# Altium PCB TestProj_DDR3.PcbDoc (part 2 of 2)
Units mil, origin at the board's own origin, x right, y up, seen from the top; angles counter-clockwise.
Board outline 6000 x 4000 mil, 4 copper layers (Component Side, Power Plane, Ground Plane, Solder Side), stack 51.034 mil thick; 26 components, 54 nets, 768 pads, 131 vias.
Unrouted connection lines stored in the file: 84.
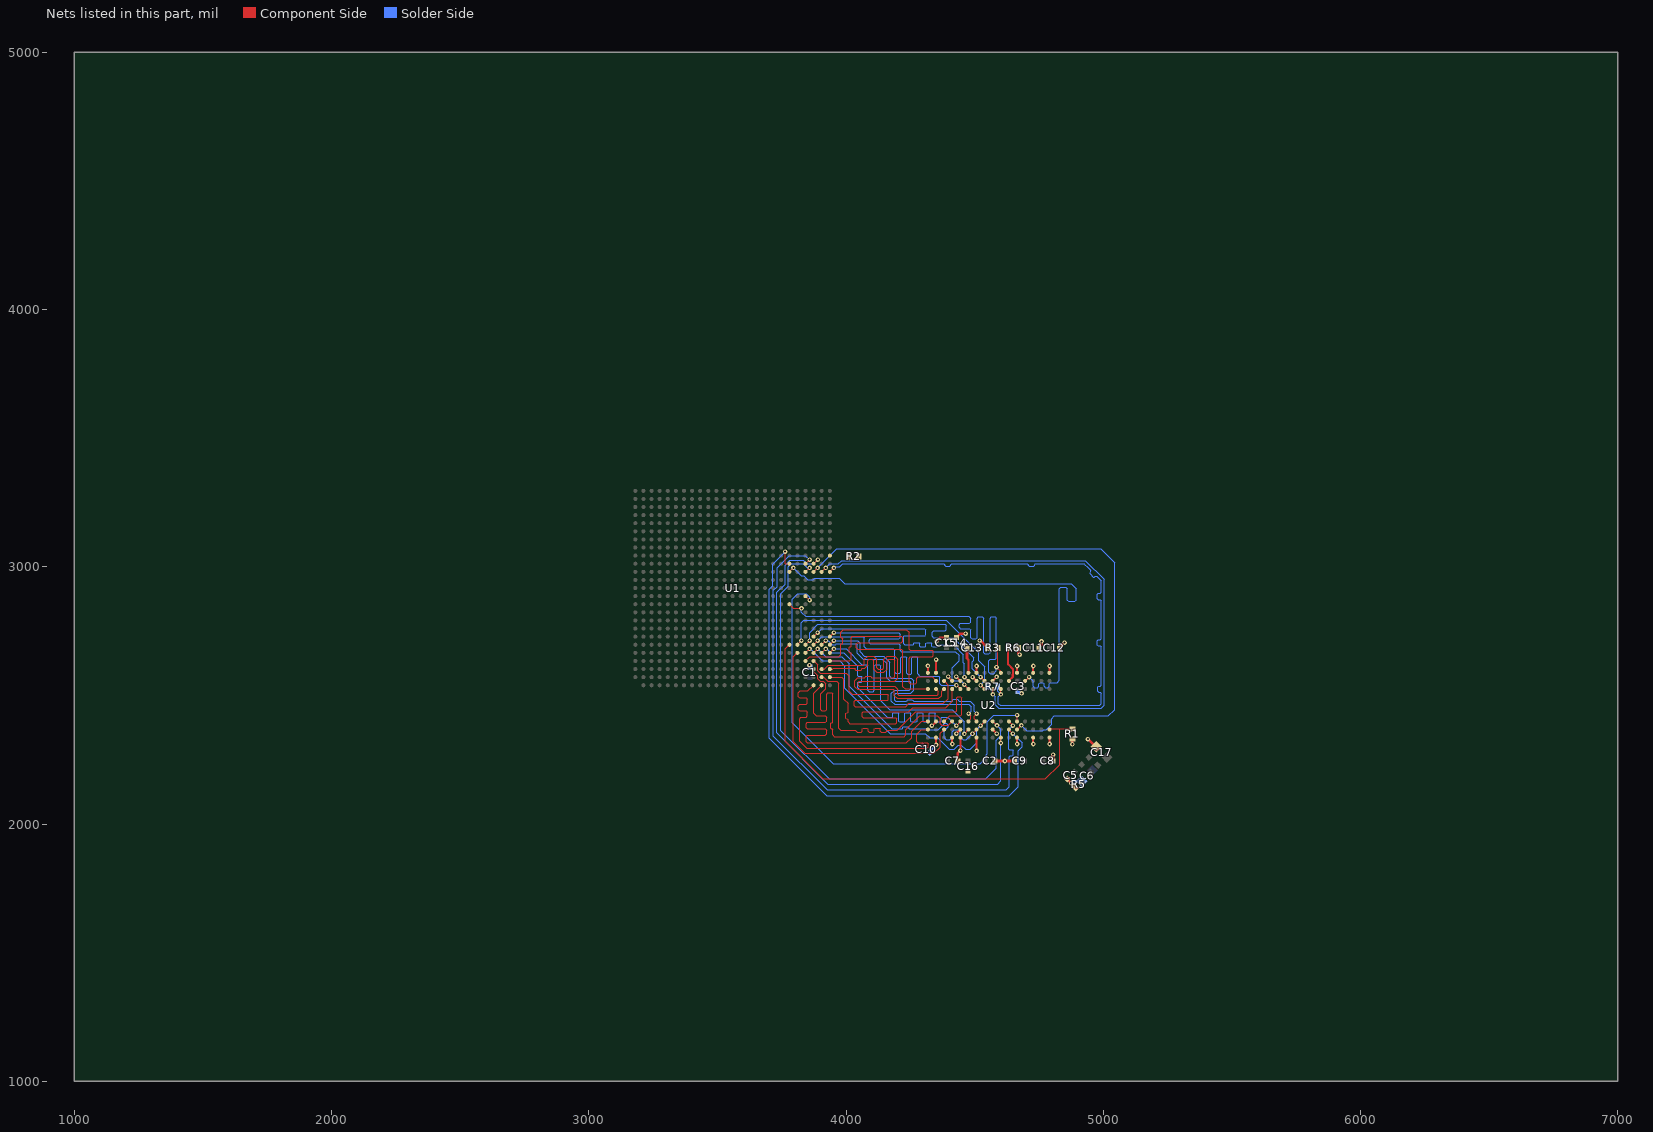
[diagram p4: the nets of this part, all layers, seen from the top]

## Via types
v1: diameter 17.72, hole 7.87, Component Side to Solder Side, 131 vias

## Nets (pads, with @x,y where several pads share a name; then routed paths per layer and width w, separated by ;. In a path a pad name is that pad's centre, name@x,y a point inside that pad or via, vN(x,y) a via of type N, cw(c..) or ccw(c..) an arc to the next point about the centre after c; other vN are vias at no path point) (continued)
DRAM_CLK0_N: R7.1 U1.AE15 U2.K7 | length 2171.6
  Component Side w4.2: v1@4601.82,2504.48 U2.K7@4601.82,2524.83
  Component Side w4.3: U1.AE15@3937.01,2980.31 v1@3948.82,2992.12
  Solder Side w4.2: 4592.71,2494.29 v1(4602.36,2503.94)
  Solder Side w4.3: v1@3956.69,2992.13 3953.82,2995 v1(3952.75,2996.06) 3956.62,2999.92 3975.92,2999.92 3988,3012 4370,3012 4379.9,3012 4383.55,3008.36 4383.55,3005.64 4387.19,3002 4404.2,3002 4407.85,3005.64 4407.85,3008.36 4411.49,3012 4420,3012 4675,3012 4684.25,3012 4704.9,3012 4708.55,3008.36 4708.55,3005.64 4712.19,3002 4729.2,3002 4732.85,3005.64 4732.85,3008.36 4736.49,3012 4745,3012 4925.61,3012 4928.8,3008.8 4937.39,3000.21 4952,2985.61 4952,2980.45 4948.73,2977.18 4948.73,2972.03 4960.76,2960 4965.91,2960 4969.18,2963.27 4974.34,2963.27 4990,2947.61 4991.7,2945.91 4991.7,2920 4991.7,2900.09 4988.06,2896.45 4980.34,2896.45 4976.7,2892.8 4976.7,2875.8 4980.34,2872.15 4988.06,2872.15 4991.7,2868.51 4991.7,2860 4991.7,2765 4991.7,2740.75 4991.7,2720.09 4988.06,2716.45 4980.34,2716.45 4976.7,2712.8 4976.7,2695.8 4980.34,2692.15 4988.06,2692.15 4991.7,2688.51 4991.7,2680 4991.7,2560 4991.7,2540.09 4988.06,2536.45 4982.34,2536.45 4978.7,2532.8 4978.7,2515.8 4982.34,2512.15 4988.06,2512.15 4991.7,2508.51 4991.7,2500 4991.7,2466.7 4987.3,2462.3 4598.7,2462.3 4592.71,2468.29 4592.71,2494.29 ; R7.1@4589.69,2534 4589.69,2516.61 v1(4602.36,2503.94)
DRAM_CLK0_P: R7.2 U1.AD15 U2.J7 | length 2176.2
  Component Side w4.2: v1@4570.32,2504.48 U2.J7@4570.32,2524.83
  Component Side w4.3: U1.AD15@3905.51,2980.31 v1(3921.25,2996.06)
  Solder Side w4.3: v1@3920.08,2995.75 v1@3920.38,2996.06 ; v1(3921.25,2996.06) v1@3920.38,2996.06 ; R7.2@4550.32,2534 4570.87,2513.45 v1(4570.87,2503.94) 4580.46,2494.34 4580.46,2490.79 4580.41,2490.74 4580.41,2463.19 4593.61,2450 4992.39,2450 5004,2461.61 5004,2951 4930.7,3024.3 3982.91,3024.3 3970.83,3012.22 3936.55,3012.22 v1@3920.38,2996.06
DRAM_CS0_B: U1.Y16 U2.L2 | length 2138.7
  Component Side w4.5: v1(3763,3059) 3763.78,3058.22 3763.78,3011.81 U1.Y16@3779.53,3011.81 ; U2.L2@4633.31,2366.69 v1(4649.06,2350.94)
  Solder Side w4.5: v1(3763,3059) 3763,3058.27 3715.44,3010.71 3715.44,2926.61 3702,2913.17 3702,2333 3925,2110 4635,2110 4670,2145 4670,2285 4685,2300 4685,2315 v1(4649.06,2350.94)
DRAM_D0: U1.AD2 U2.C3 | length 1017
  Component Side w4.5: U1.AD2@3905.51,2570.87 3914.13,2570.87 3929.88,2555.12 3964.57,2555.12 3972.44,2547.24 3972.44,2372.56 3980,2365 4019.68,2365 4036.52,2365 4040.04,2361.47 4040.04,2360.52 4043.57,2357 4060.02,2357 4063.54,2360.52 4063.54,2365 4063.54,2369.48 4067.07,2373 4083.52,2373 4087.04,2369.48 4087.04,2365 4087.04,2360.52 4090.57,2357 4107.02,2357 4110.54,2360.52 4110.54,2365 4110.54,2369.48 4114.07,2373 4130.52,2373 4134.04,2369.48 4134.04,2365 4134.04,2360.52 4137.57,2357 4154.02,2357 4157.54,2360.52 4157.54,2361.47 4161.07,2365 4169.29,2365 4199.65,2365 4271.65,2437.01 4427.01,2437.01 4430,2440 4430,2490 4435,2495 4445,2495 4450,2490 4450,2425 4445,2420 4402.5,2420 U2.C3@4381.35,2398.84
DRAM_D1: U1.AE2 U2.D7 | length 1018.9
  Component Side w4.5: U1.AE2@3937.01,2570.87 3984.25,2570.87 3992.13,2562.99 3992.13,2484.25 4007.87,2468.5 4007.87,2444.88 4007.87,2434.73 4005.52,2432.38 4002.22,2432.38 3999.87,2430.03 3999.87,2411.23 4002.22,2408.88 4005.52,2408.88 4007.87,2406.53 4007.87,2397.13 4015.24,2389.76 4192.91,2389.76 4196.85,2393.7 4196.85,2409.45 4192.91,2413.39 4066.93,2413.39 4062.99,2417.32 4062.99,2433.07 4066.93,2437.01 4243.55,2437.01 4259.3,2452.76 4387.76,2452.76 4412.84,2477.84 U2.D7@4412.84,2524.83
DRAM_D2: U1.AC4 U2.C8 | length 1018.3
  Component Side w4.5: U1.AC4@3874.02,2633.86 3889.47,2618.4 3889.47,2596.55 3899.41,2586.61 4000,2586.61 4011.81,2574.8 4011.81,2515.75 4023.62,2503.94 4161.42,2503.94 4165,2500.35 4165,2483.9 4161.42,2480.32 4035.43,2480.32 4031.5,2476.38 4031.5,2460.63 4035.43,2456.69 4232.28,2456.69 4244.09,2468.5 4378.5,2468.5 4397.39,2487.39 4397.39,2540.28 U2.C8@4381.35,2556.32
DRAM_D3: U1.AA5 U2.C2 | length 1026.5
  Component Side w4.5: U1.AA5@3811.03,2665.35 3795.28,2649.61 3795.28,2318.9 3839.17,2275 4341.93,2275 4365.89,2298.96 4365.89,2351.89 U2.C2@4381.35,2367.35
DRAM_D4: U1.AC1 U2.A2 | length 1022.9
  Component Side w4.5: U1.AC1@3874.02,2539.37 3852.01,2517.36 3822.36,2517.36 3815,2510 3815,2495 3820,2490 3845,2490 3850,2485 3850,2470 3845,2465 3820,2465 3815,2460 3815,2445 3820,2440 3845,2440 3850,2435 3850,2420 3845,2415 3825,2415 3820,2410 3820,2321.73 3846.73,2295 4314.69,2295 4318.9,2299.21 4318.9,2311.02 4314.96,2314.96 4279.53,2314.96 4275,2319.49 4275,2349.8 4292.54,2367.35 U2.A2@4318.35,2367.35
DRAM_D5: U1.AD1 U2.A3 | length 1020.4
  Component Side w4.5: U1.AD1@3905.51,2539.37 3875,2508.86 3875,2430 3885,2420 3920,2420 3925,2415 3925,2400 3920,2395 3850,2395 3845,2390 3845,2375 3850,2370 3920,2370 3925,2365 3925,2350 3920,2345 3850,2345 3845,2340 3845,2320 3850,2315 4235,2315 4255,2335 4255,2360 4293.84,2398.84 U2.A3@4318.35,2398.84
DRAM_D6: U1.AB4 U2.B8 | length 1024.9
  Component Side w4.5: U1.AB4@3842.52,2633.86 3858.56,2649.9 3971.28,2649.9 3980,2658.62 3980,2692.91 3980,2698.62 3982.35,2700.97 3985.38,2700.97 3987.73,2703.32 3987.73,2722.12 3985.38,2724.47 3982.35,2724.47 3980,2726.82 3980,2736.22 3980,2745 3990,2755 4235,2755 4245,2745 4245,2680 4250,2675 4335,2675 4340,2670 4340,2655 4335,2650 4250,2650 4245,2645 4245,2550 4250,2545 4270,2545 4275,2550 4275,2566.78 4280,2571.78 4334.4,2571.78 U2.B8@4349.85,2556.32
DRAM_D7: U1.AE4 U2.A7 | length 1024.9
  Component Side w4.5: U1.AE4@3937.01,2633.86 4013.86,2633.86 4020,2640 4020,2653.54 4020,2662.94 4017.65,2665.29 4014.92,2665.29 4012.57,2667.64 4012.57,2686.44 4014.92,2688.79 4017.65,2688.79 4020,2691.14 4020,2692.91 4020,2725 4025,2730 4215,2730 4220,2725 4220,2710 4215,2705 4045,2705 4040,2700 4040,2685 4045,2680 4215,2680 4220.47,2674.53 4220.47,2534.53 4230.17,2524.83 U2.A7@4318.35,2524.83
DRAM_D8: U1.AD5 U2.E3 | length 1000.4
  Component Side w4.5: U1.AD5@3905.51,2665.35 v1(3921.26,2681.1) ; v1@4429.57,2382.33 U2.E3@4444.34,2397.09
  Solder Side w4.5: v1(3921.26,2681.1) 3925.39,2681.1 3941.14,2665.35 3992.13,2665.35 4045,2612.48 4045,2586.61 4045,2577.21 4047.35,2574.86 4059.65,2574.86 4062,2572.51 4062,2553.71 4059.65,2551.36 4045.18,2551.36 4045,2551.18 4045,2530 4160,2415 4181.1,2415 4182.14,2416.04 4182.14,2429.65 4184.49,2432 4203.29,2432 4205.64,2429.65 4205.64,2415 4205.64,2400.35 4207.99,2398 4226.79,2398 4229.14,2400.35 4229.14,2415 4229.14,2429.65 4231.49,2432 4250.29,2432 4252.64,2429.65 4252.64,2415 4252.64,2400.35 4254.99,2398 4273.79,2398 4276.14,2400.35 4276.14,2415 4276.14,2429.65 4278.49,2432 4297.29,2432 4299.64,2429.65 4299.64,2415 4299.64,2400.35 4301.99,2398 4320.79,2398 4323.14,2400.35 4323.14,2415 4323.14,2429.65 4325.49,2432 4344.29,2432 4346.64,2429.65 4346.64,2415 4346.64,2400.35 4348.99,2398 4367.79,2398 4370.14,2400.35 4370.14,2412.65 4372.49,2415 4381.89,2415 4396.02,2415 v1(4428.7,2382.33)
DRAM_D9: U1.AE5 U2.F2 | length 992.6
  Component Side w4.5: U1.AE5@3937.01,2665.35 v1(3952.76,2681.1) ; v1@4460.96,2350.73 U2.F2@4475.83,2365.6
  Solder Side w4.5: v1(3952.76,2681.1) 4000,2681.1 4061.1,2620 4080,2620 4085,2615 4085,2520 4090,2515 4105,2515 4110,2520 4110,2615 4115,2620 4130,2620 4135,2615 4135,2480 4170,2445 4413.27,2445 4460.09,2398.18 v1(4460.09,2350.73)
DRAM_D10: U1.AA6 U2.H7 | length 1000.4
  Component Side w4.5: U1.AA6@3811.03,2696.85 v1(3826.77,2712.6) ; v1(4523.62,2539.37) 4538.17,2524.83 U2.H7@4538.83,2524.83
  Solder Side w4.5: v1(3826.77,2712.6) 3826.77,2781.77 3836.34,2791.34 4390.46,2791.34 4516,2665.8 4516,2635 4538.83,2612.17 4539.06,2612.17 4539.06,2557.22 4523.62,2541.78 v1(4523.62,2539.37)
DRAM_D11: U1.AE7 U2.F7 | length 995.4
  Component Side w4.5: U1.AE7@3937.01,2728.35 v1(3952.76,2744.09) ; v1@4460.09,2540.57 U2.F7@4475.83,2524.83
  Solder Side w4.5: v1(3952.76,2744.09) 4204.47,2744.09 4210,2738.57 4210,2725 4205,2720 4095,2720 4090,2715 4090,2705 4094.21,2700.79 4204.21,2700.79 4210,2695 4210,2675 4215,2670 4425.63,2670 4440,2655.63 4440,2635 4413.15,2608.15 4413.15,2563.5 4420,2556.65 4448.57,2556.65 4460.09,2545.13 v1(4460.09,2541.45)
DRAM_D12: U1.AB5 U2.H3 | length 1002
  Component Side w4.5: U1.AB5@3842.52,2665.35 v1(3858.27,2681.1) ; v1@4524.06,2382.33 U2.H3@4538.83,2397.09
  Solder Side w4.5: v1(3858.27,2681.1) 3860.06,2681.1 3907.3,2633.86 3976.38,2633.86 3996.06,2614.17 3996.06,2527.56 4172.33,2351.29 4308.71,2351.29 4324.61,2335.39 4357.52,2335.39 4401.57,2291.34 4421.26,2291.34 4437.01,2307.09 4448.82,2307.09 4464.57,2291.34 4483.67,2291.34 4507.33,2315 4507.33,2367.35 4522.75,2382.76 v1(4523.18,2382.33)
DRAM_D13: U1.AC5 U2.G2 | length 993.9
  Component Side w4.5: U1.AC5@3874.02,2665.35 v1(3889.76,2681.1) ; v1@4491.69,2351.7 U2.G2@4507.33,2367.35
  Solder Side w4.5: v1(3889.76,2681.1) 3920.97,2649.9 3983.96,2649.9 4011.81,2622.05 4011.81,2535.43 4177.24,2370 4208.66,2370 4218.06,2370 4220.41,2372.35 4220.41,2375.65 4222.76,2378 4241.56,2378 4243.91,2375.65 4243.91,2372.35 4246.26,2370 4265,2370 4316.27,2370 4320,2366.27 4359,2366.27 4383.73,2391 4389.78,2391 4397.39,2383.39 4397.39,2377.39 4381,2361 4381,2335.54 4389.76,2326.77 4403.76,2326.77 4412.84,2335.85 4412.84,2358.84 4421,2367 4421.11,2366.89 4434.95,2366.89 4444.44,2357.4 4444.44,2338.33 4456,2326.77 4467.63,2326.77 v1(4491.69,2350.83)
DRAM_D14: U1.AB6 U2.H8 | length 998.4
  Component Side w4.5: U1.AB6@3842.52,2696.85 v1(3858.27,2712.6) ; v1(4523.62,2570.87) 4538.17,2556.32 U2.H8@4538.83,2556.32
  Solder Side w4.5: v1(3858.27,2712.6) 3858.27,2744.09 3889.77,2775.59 4377.95,2775.59 4385.83,2775.59 4389.76,2771.65 4389.76,2755.91 4385.83,2751.97 4341.97,2751.97 4335,2745 4335,2730 4340,2725 4416.73,2725 4496.06,2645.67 4496.06,2636.08 4490,2630.02 4490,2604.49 v1(4523.62,2570.87)
DRAM_D15: U1.AC7 U2.F8 | length 997.6
  Component Side w4.5: U1.AC7@3874.02,2728.35 v1(3889.76,2744.09) ; v1(4460.63,2570.87) 4475.17,2556.32 U2.F8@4475.83,2556.32
  Solder Side w4.5: v1(3889.76,2744.09) 3905.51,2759.84 4305.16,2759.84 4310,2755 4310,2735 4307.28,2732.28 4227.28,2732.28 4225,2730 4225,2700 4228.15,2696.85 4251.97,2696.85 4261.37,2696.85 4263.72,2699.2 4263.72,2702.5 4266.07,2704.85 4284.87,2704.85 4287.22,2702.5 4287.22,2696.85 4287.22,2691.2 4289.57,2688.85 4308.37,2688.85 4310.72,2691.2 4310.72,2696.85 4310.72,2702.5 4313.07,2704.85 4331.87,2704.85 4334.22,2702.5 4334.22,2696.85 4334.22,2691.2 4336.57,2688.85 4355.37,2688.85 4357.72,2691.2 4357.72,2694.5 4360.07,2696.85 4366.14,2696.85 4418.15,2696.85 4456.69,2658.31 4456.69,2625.98 4460.63,2622.05 v1(4460.63,2570.87)
DRAM_DQM0: U1.AC3 U2.D3 | length 1022.9
  Component Side w4.5: U1.AC3@3874.02,2602.36 3874.02,2592.72 3889.47,2577.27 3889.47,2565.05 3899.7,2554.82 3911.91,2554.82 3913.74,2553 3914,2553 3921,2546 3921,2526 3901.57,2506.57 3901.57,2445 3906.57,2440 3920,2440 3925,2445 3925,2505 3930,2510 3945,2510 3948.82,2506.18 3948.82,2401.57 3948.82,2395.87 3946.47,2393.52 3943.17,2393.52 3940.82,2391.17 3940.82,2372.37 3943.17,2370.02 3946.47,2370.02 3948.82,2367.67 3948.82,2358.27 3948.82,2346.46 3955.28,2340 4225.83,2340 4232.28,2346.46 4232.28,2366.14 4287.4,2421.26 4354.33,2421.26 4365.89,2409.7 4365.89,2390.01 4372.52,2383.39 4397.39,2383.39 U2.D3@4412.84,2398.84
DRAM_DQM1: U1.AC6 U2.E7 | length 999.5
  Component Side w4.5: U1.AC6@3874.02,2696.85 v1(3889.76,2712.6) ; v1@4429.8,2539.37 U2.E7@4444.34,2524.83
  Solder Side w4.5: v1(3889.76,2712.6) 3905.51,2728.35 3968.5,2728.35 4066.93,2728.35 4070.87,2724.41 4070.87,2688.98 4078.74,2681.1 4183.94,2681.1 4188.98,2676.06 4188.98,2590.55 4192.91,2586.61 4208.66,2586.61 4212.6,2590.55 4212.6,2645.67 4216.54,2649.61 4232.28,2649.61 4236.22,2645.67 4236.22,2586.61 4240.16,2582.68 4251.97,2582.68 4255.91,2586.61 4255.91,2645.67 4259.3,2649.06 4259.3,2649.61 4259.69,2650 4275.59,2650 4278.98,2646.61 4278.98,2583.22 4287.4,2574.8 4327.68,2574.8 4327.88,2575 4360,2575 4365,2570 4365,2545 4370.63,2539.37 v1(4429.13,2539.37)
DRAM_DQS0_N: U1.AD3 U2.B7 | length 1025.2
  Component Side w4.2: U1.AD3@3905.51,2602.36 3915.86,2602.36 3930.16,2616.67 3950.27,2616.67 4067.09,2616.67 4071.5,2621.08 4071.5,2640.18 4083.82,2652.5 4108.18,2652.5 4120,2640.68 4120,2607.68 4125.18,2602.5 4142.5,2602.5 4147.5,2607.5 4147.5,2640.18 4159.82,2652.5 4190.18,2652.5 4201.48,2641.2 4201.48,2566.48 4190.12,2555.12 4051.18,2555.12 4047.24,2551.18 4047.24,2539.37 4051.18,2535.43 4189.24,2535.43 4200.79,2523.89 4200.79,2504.21 4204.31,2500.69 4355.69,2500.69 4359.35,2504.35 4359.35,2515.33 U2.B7@4349.85,2524.83
DRAM_DQS0_P: U1.AE3 U2.C7 | length 1025.4
  Component Side w4.2: U1.AE3@3937.01,2602.36 3947.63,2602.36 3950.27,2605 4003.94,2605 4033.96,2605 4036.38,2602.58 4036.38,2599.42 4038.8,2597 4058.16,2597 4060.58,2599.42 4060.58,2602.58 4063,2605 4072.68,2605 4084,2616.32 4084,2635 4089,2640 4103,2640 4107.5,2635.5 4107.5,2602.5 4120,2590 4147.68,2590 4160,2602.32 4160,2635 4165,2640 4185,2640 4188.98,2636.02 4188.98,2571.65 4184.94,2567.62 4110.24,2567.62 4100.11,2567.62 4097.79,2569.94 4097.79,2571.09 4095.47,2573.41 4076.91,2573.41 4074.59,2571.09 4074.59,2569.94 4072.27,2567.62 4062.99,2567.62 4046,2567.62 4034.74,2556.36 4034.74,2534.19 4046,2522.93 4184.07,2522.93 4188.29,2518.71 4188.29,2499.04 4199.13,2488.19 4360.87,2488.19 4371.85,2499.17 4371.85,2515.33 U2.C7@4381.35,2524.83
DRAM_DQS1_N: U1.AE6 U2.G3 | length 1000.4
  Component Side w4.2: U1.AE6@3937.01,2696.85 v1(3952.76,2712.6) ; U2.G3@4507.33,2398.84 4497.68,2408.49 4497.68,2418.94 v1(4507.87,2429.13)
  Solder Side w4.2: v1(3952.76,2712.6) 3953.06,2712.9 4040.58,2712.9 4040.93,2712.55 4044.86,2712.55 4055.51,2701.9 4055.51,2668.9 4071.91,2652.5 4146.5,2652.5 4169.68,2629.32 4169.68,2574.41 4176.87,2567.23 4253.17,2567.23 4264.17,2556.23 4264.17,2520.92 4251.05,2507.8 4193.8,2507.8 4188.98,2502.98 4188.98,2482.02 4194,2477 4220.47,2477 4234.96,2477 4237.28,2479.32 4237.28,2481.36 4239.6,2483.68 4258.16,2483.68 4260.48,2481.36 4260.48,2479.32 4262.8,2477 4283.68,2477 4295.28,2477 4401.57,2477 4412.12,2477 4414.44,2479.32 4414.44,2482.68 4416.76,2485 4435.32,2485 4437.64,2482.68 4437.64,2479.32 4439.96,2477 4460.84,2477 4472.44,2477 4483,2477 4498.23,2461.77 4498.23,2438.78 v1(4507.87,2429.13)
DRAM_DQS1_P: U1.AD6 U2.F3 | length 1000.4
  Component Side w4.2: U1.AD6@3905.51,2696.85 v1(3921.26,2712.6) ; U2.F3@4475.83,2398.84 4485.48,2408.49 4485.48,2420.03 v1(4476.38,2429.13)
  Solder Side w4.2: v1(3921.26,2712.6) 3930.57,2712.6 3946.26,2696.91 3959.25,2696.91 3962.69,2700.35 4039.81,2700.35 4043.31,2696.85 4043.31,2663.85 4066.86,2640.3 4141.45,2640.3 4157.48,2624.27 4157.48,2569.36 4172.11,2554.73 4248.42,2554.73 4251.97,2551.18 4251.97,2525.97 4246,2520 4188.75,2520 4176.78,2508.03 4176.78,2476.97 4188.95,2464.8 4477.95,2464.8 4486.03,2456.72 4486.03,2438.78 v1(4476.38,2429.13)
DRAM_RAS_B: U1.AB15 U2.J3 | length 1901.3
  Component Side w4.5: U1.AB15@3842.52,2980.31 v1(3858.26,2996.06) ; U2.J3@4570.32,2398.84 4571.2,2398.84 v1(4586.94,2383.1)
  Solder Side w4.5: v1@3858.88,2996.06 v1(3858.26,2996.06) 3848.94,2996.06 3833.5,3011.5 3787.5,3011.5 3775.5,2999.5 3775.5,2924.5 3747,2896 3747,2363 3935,2175 4544,2175 4585,2216 4585,2326 4601.51,2342.51 4601.51,2368.53 v1(4586.94,2383.1)
DRAM_RESET_B: R1.2 U1.Y6 U2.T2 | length 1761.6
  Component Side w4.5: U1.Y6@3779.53,2696.85 3763.78,2681.1 3763.78,2321.22 3910,2175 4775,2175 4830,2230 4830,2369.69
  Component Side w4.6: U2.T2@4790.79,2367.35 4793.13,2369.69 4830,2369.69 R1.2@4880,2369.69
DRAM_SDBA0: U1.AC15 U2.M2 | length 2244.2
  Component Side w4.5: U1.AC15@3874.02,2980.31 3889.15,2995.44 v1(3890,2995.44) ; U2.M2@4664.81,2367.81 U2.M2@4664.81,2367.35 4665.68,2367.35 v1(4681.43,2383.09)
  Solder Side w4.5: v1(3890,2995.44) 3964.56,3070 4990,3070 5045,3015 5045,2445 5020,2420 4810,2420 4800,2410 4800,2388.4 4777.76,2366.16 4768.65,2366.16 4764.04,2361.55 4702.97,2361.55 v1(4681.43,2383.09)
DRAM_SDBA1: U1.Y15 U2.N8 | length 1895.8
  Component Side w4.5: U1.Y15@3779.53,2980.31 v1(3795.28,2996.06) ; U2.N8@4696.31,2556.32 4698.06,2556.32 4712.16,2570.43 v1(4712.16,2571.3)
  Solder Side w4.5: v1(3795.28,2996.06) 3826.77,2964.57 3836.43,2964.57 3851.87,2949.13 3857.96,2949.13 3858.27,2948.82 3872.07,2948.82 3878.18,2954.93 3974.2,2954.93 3995.75,2933.38 4876.62,2933.38 4895,2915 4895,2870 4890,2865 4865,2865 4860,2870 4860,2915 4855,2920 4835,2920 4829.69,2914.69 4829.69,2558.69 4821,2550 4795,2550 4790,2545 4790,2535 4785,2530 4775,2530 4770,2535 4770,2545 4765,2550 4755,2550 4750,2545 4750,2535 4745,2530 4732.6,2530 4727.6,2535 4727.6,2555.86 v1(4712.16,2571.3)
DRAM_SDBA2: U1.AB12 U2.M3 | length 1716.9
  Component Side w4.5: U1.AB12@3842.52,2885.83 v1(3858.27,2870.08) ; U2.M3@4664.81,2398.84 4664.81,2398.18 4665.35,2398.73 4665,2399.08 v1(4665,2423)
  Solder Side w4.5: v1(3858.27,2870.08) 3858.27,2881.73 3845,2895 3813,2895 3792,2874 3792,2393 3950,2235 4522.4,2235 4545,2257.6 4545,2269 4549.44,2273.44 4549.44,2397.44 4575,2423 v1(4665,2423)
DRAM_SDCKE0: R3.2 U1.Y11 U2.K9 | length 1739.8
  Component Side w4.5: U1.Y11@3779.53,2854.33 3795.86,2838 v1(3827,2838) ; R3.2@4590,2685 4590,2615 v1(4585,2610) 4601.82,2593.18 U2.K9@4601.82,2587.82
  Solder Side w4.5: v1(3827,2838) 3827,2824 3843.91,2807.09 4477.91,2807.09 4485,2800 4485,2785 4480,2780 4445,2780 4440,2775 4440,2765 4445,2760 4480,2760 4485,2755 4485,2725 4490,2720 4505,2720 4510,2725 4510,2800 4515,2805 4530,2805 4535,2800 4535,2666.38 4540,2661.38 4555,2661.38 4560,2666.38 4560,2800 4565,2805 4580,2805 4585,2800 4585,2645 4580,2640 4560,2640 4555,2635 4555,2590 4560,2585 4575,2585 4585,2595 v1(4585,2610)
DRAM_SDODT0: U1.AC16 U2.K1 | length 1962.9
  Component Side w4.5: U1.AC16@3874.02,3011.81 3889.77,3027.56 v1(3890.64,3027.56) ; U2.K1@4601.82,2335.85 4602.36,2335.31 v1(4602.36,2314.96)
  Solder Side w4.5: v1(3890.64,3027.56) 3889.77,3027.56 3874.02,3011.81 3847.19,3011.81 3834,3025 3782.18,3025 3769.3,3012.12 3769.12,3012.12 3763.21,3006.21 3763.21,2932.5 3731,2900.29 3731,2354 3930,2155 4589,2155 4602.36,2168.36 v1(4602.36,2314.96)
DRAM_WE_B: U1.AB16 U2.L3 | length 2132.7
  Component Side w4.5: U1.AB16@3842.52,3011.81 v1(3858.27,3027.56) ; U2.L3@4633.31,2398.84 v1@4647.53,2384.63
  Solder Side w4.5: v1(3858.27,3027.56) 3842.52,3043.31 3779.53,3043.31 3732,2995.78 3732,2922 3718,2908 3718,2342 3926.51,2133.49 4623.49,2133.49 4635,2145 4635,2261.89 4637.86,2264.75 4647.76,2264.75 4650.11,2267.1 4650.11,2285.9 4647.76,2288.25 4635.46,2288.25 4633.11,2290.6 4633.11,2300 4633.11,2366.27 v1(4649.06,2382.22)
DRAM_ZQ: R6.2 U2.L8 | length 143
  Component Side w7: 4649.06,2579.24 4649.06,2601.94
  Component Side w8: R6.2@4630.31,2685 4630.31,2620.69 4649.06,2601.94 ; U2.L8@4633.31,2556.32 4649.06,2572.07
  Component Side w10: 4649.06,2572.07 4649.06,2579.24
GND: C1.2 C2.2 C3.2 C5.2 C6.2 C7.2 C8.2 C9.2 C10.2 C11.2 C12.2 C13.2 C14.2 C15.2 C16.2 C17.2 R1.1 R2.2 R3.1 R5.1 R6.1 U2.A9 U2.B1 U2.B3 U2.B9 U2.D1 U2.D8 U2.E1 U2.E2 U2.E8 U2.F9 U2.G1 U2.G8 U2.G9 U2.J2 U2.J8 U2.M1 U2.M9 U2.P1 U2.P9 U2.T1 U2.T9 | length 1260.8
  Component Side w8: U2.A9@4318.35,2587.82 v1(4318.35,2614.72) ; v1@4335.08,2382.33 U2.B3@4349.85,2397.09 ; v1@4349.85,2307.63 U2.B1@4349.85,2335.85 ; U2.B9@4350.39,2588.36 v1(4350.39,2639) ; v1@4397.52,2570.98 U2.D8@4412.18,2556.32 ; v1@4412.84,2311.57 U2.D1@4412.84,2335.85 ; v1@4428.59,2572.07 U2.E8@4444.34,2556.32 ; v1@4429,2352.01 U2.E2@4444.34,2367.35 ; v1(4444.34,2285.21) U2.E1@4444.34,2335.85 ; U2.F9@4475.83,2587.82 4475.83,2638.46 ; v1@4492.79,2570.87 U2.G8@4507.33,2556.32 ; v1@4507.33,2285.21 U2.G1@4507.33,2335.85 ; U2.G9@4507.33,2587.82 v1@4507.33,2613.63 ; U2.J2@4570.32,2367.35 v1(4586.07,2351.6) ; U2.J8@4570.32,2557.2 v1(4585.3,2572.18) ; v1@4664.81,2311.57 U2.M1@4664.81,2335.85 ; U2.M9@4664.81,2587.82 v1@4664.81,2613.63 ; v1@4727.8,2311.57 U2.P1@4727.8,2335.85 ; U2.P9@4727.8,2587.82 v1@4727.8,2613.63 ; v1@4790.79,2311.57 U2.T1@4790.79,2335.85 ; U2.T9@4790.79,2587.82 v1@4790.79,2613.63
  Component Side w10: v1(4334.21,2382.33) v1@4335.08,2382.33 ; v1@4349.85,2307.63 v1(4350.12,2307.36) ; U2.B9@4349.85,2587.82 U2.B9@4350.39,2588.36 ; v1(4350.95,2709.56) 4366.07,2724.69 C15.2@4390,2724.69 ; v1@4397.52,2570.98 v1(4397.52,2572.52) ; v1@4412.84,2311.57 v1(4413.39,2311.02) ; v1@4428.59,2572.07 v1(4428.59,2572.94) ; v1(4429,2351) v1@4429,2352.01 ; C14.2@4430,2724.69 4445.31,2740 v1(4465,2740) ; C7.2@4434.37,2245 4434.37,2275.24 v1(4444.34,2285.21) ; C13.2@4470.31,2685 4470.31,2643.98 4475.83,2638.46 ; v1(4492.13,2570.87) v1@4492.79,2570.87 ; v1@4507.33,2285.21 v1(4507.87,2284.67) ; v1@4507.33,2613.63 v1(4507.87,2614.17) ; v1(4519.56,2712.73) 4522.27,2712.73 4550,2685 R3.1@4550.63,2685 ; U2.J8@4570.32,2556.32 U2.J8@4570.32,2557.2 ; C2.2@4579.69,2245 v1(4617.8,2245) C9.2@4655.31,2245 ; v1@4664.81,2311.57 v1(4665.35,2311.02) ; v1@4664.81,2613.63 v1(4665.35,2614.17) ; R6.1@4669.68,2685 4669.68,2664 v1(4675,2658.68) ; v1@4727.8,2311.57 v1(4728.35,2311.02) ; v1@4727.8,2613.63 v1(4728.35,2614.17) ; C11.2@4749.69,2685 4760,2695.31 v1(4760,2710) ; v1@4790.79,2311.57 v1(4791.34,2311.02) ; v1@4790.79,2613.63 v1(4791.34,2614.17) ; C8.2@4804.69,2245 4804.69,2269.69 v1(4805,2270) ; C12.2@4829.69,2685 v1(4849.37,2704.69) ; C5.2@4860,2175 4891.08,2143.92 R5.1@4891.08,2141.08 ; v1(4880,2310) R1.1@4880,2330.32 ; v1(4940,2330) 4969.42,2300.58 C17.2@4972.42,2300.58
  Solder Side w10: v1(3858,2618) 3860,2620 C1.2@3860,2609.69 ; C10.2@4325.86,2277.16 4325.86,2283.1 v1(4350.12,2307.36) ; C3.2@4669.29,2515.75 4678.04,2507 4684.13,2507 4684.13,2507.87 v1(4682.64,2507.87) ; v1(4875,2158.41) 4882.88,2166.28 C6.2@4916.28,2166.28
ZQPAD: R2.1 U1.AE17
pads on no net: U1.A2 U1.A3 U1.A4 U1.A5 U1.A6 U1.A7 U1.A8 U1.A9 U1.A10 U1.A11 U1.A12 U1.A13 U1.A14 U1.A15 U1.A16 U1.A17 U1.A18 U1.A19 U1.A20 U1.A21 U1.A22 U1.A23 U1.A24 U1.A25 U1.AA1 U1.AA2 U1.AA3 U1.AA4 U1.AA7 U1.AA8 U1.AA9 U1.AA10 U1.AA11 U1.AA13 U1.AA16 U1.AA17 U1.AA18 U1.AA19 U1.AA20 U1.AA21 U1.AA22 U1.AA23 U1.AA24 U1.AA25 U1.AB1 U1.AB2 U1.AB3 U1.AB7 U1.AB8 U1.AB9 U1.AB10 U1.AB11 U1.AB17 U1.AB18 U1.AB19 U1.AB20 U1.AB21 U1.AB22 U1.AB23 U1.AB24 U1.AB25 U1.AC8 U1.AC9 U1.AC10 U1.AC11 U1.AC18 U1.AC19 U1.AC20 U1.AC21 U1.AC22 U1.AC23 U1.AC24 U1.AC25 U1.AD4 U1.AD7 U1.AD8 U1.AD9 U1.AD10 U1.AD11 U1.AD13 U1.AD14 U1.AD16 U1.AD17 U1.AD18 U1.AD19 U1.AD20 U1.AD21 U1.AD22 U1.AD23 U1.AD24 U1.AD25 U1.AE1 U1.AE8 U1.AE9 U1.AE10 U1.AE11 U1.AE14 U1.AE18 U1.AE19 U1.AE20 U1.AE21 U1.AE22 U1.AE23 U1.AE24 U1.AE25 U1.B1 U1.B2 U1.B3 U1.B4 U1.B5 U1.B6 U1.B7 U1.B8 U1.B9 U1.B10 U1.B11 U1.B12 U1.B13 U1.B14 U1.B15 U1.B16 U1.B17 U1.B18 U1.B19 U1.B20 U1.B21 U1.B22 U1.B23 U1.B24 U1.B25 U1.C1 U1.C2 U1.C3 U1.C4 U1.C5 U1.C6 U1.C7 U1.C8 U1.C9 U1.C10 U1.C11 U1.C12 U1.C13 U1.C14 U1.C15 U1.C16 U1.C17 U1.C18 U1.C19 U1.C20 U1.C21 U1.C22 U1.C23 U1.C24 U1.C25 U1.D1 U1.D2 U1.D3 U1.D4 U1.D5 U1.D6 U1.D7 U1.D8 U1.D9 U1.D10 U1.D11 U1.D12 U1.D13 U1.D14 U1.D15 U1.D16 U1.D17 U1.D18 U1.D19 U1.D20 U1.D21 U1.D22 U1.D23 U1.D24 U1.D25 U1.E1 U1.E2 U1.E3 U1.E4 U1.E5 U1.E6 U1.E7 U1.E8 U1.E9 U1.E10 U1.E11 U1.E12 U1.E13 U1.E14 U1.E15 U1.E16 U1.E17 U1.E18 U1.E19 U1.E20 U1.E21 U1.E22 U1.E23 U1.E24 U1.E25 U1.F1 U1.F2 U1.F3 U1.F4 U1.F5 U1.F6 U1.F7 U1.F8 U1.F9 U1.F10 U1.F11 U1.F12 U1.F13 U1.F14 U1.F15 U1.F16 U1.F17 U1.F18 U1.F19 U1.F20 U1.F21 U1.F22 U1.F23 U1.F24 U1.F25 U1.G1 U1.G2 U1.G3 U1.G4 U1.G5 U1.G6 U1.G7 U1.G8 U1.G9 U1.G10 U1.G11 U1.G12 U1.G13 U1.G14 U1.G15 U1.G16 U1.G17 U1.G18 U1.G19 U1.G20 U1.G21 U1.G22 U1.G23 U1.G24 U1.G25 U1.H1 U1.H2 U1.H3 U1.H4 U1.H5 U1.H6 U1.H7 U1.H8 U1.H9 U1.H10 U1.H11 U1.H12 U1.H13 U1.H14 U1.H15 U1.H16 U1.H17 U1.H18 U1.H19 U1.H20 U1.H21 U1.H22 U1.H23 U1.H24 U1.H25 U1.J1 U1.J2 U1.J3 U1.J4 U1.J5 U1.J6 U1.J7 U1.J8 U1.J9 U1.J10 U1.J11 U1.J12 U1.J13 U1.J14 U1.J15 U1.J16 U1.J17 U1.J18 U1.J19 U1.J20 U1.J21 U1.J22 U1.J23 U1.J24 U1.J25 U1.K1 U1.K2 U1.K3 U1.K4 U1.K5 U1.K6 U1.K7 U1.K8 U1.K9 U1.K10 U1.K11 U1.K12 U1.K13 U1.K14 U1.K15 U1.K16 U1.K17 U1.K18 U1.K19 U1.K20 U1.K21 U1.K22 U1.K23 U1.K24 U1.K25 U1.L1 U1.L2 U1.L3 U1.L4 U1.L5 U1.L6 U1.L7 U1.L8 U1.L9 U1.L10 U1.L11 U1.L12 U1.L13 U1.L14 U1.L15 U1.L16 U1.L17 U1.L18 U1.L19 U1.L20 U1.L21 U1.L22 U1.L23 U1.L24 U1.L25 U1.M1 U1.M2 U1.M3 U1.M4 U1.M5 U1.M6 U1.M7 U1.M8 U1.M9 U1.M10 U1.M11 U1.M12 U1.M13 U1.M14 U1.M15 U1.M16 U1.M17 U1.M18 U1.M19 U1.M20 U1.M21 U1.M22 U1.M23 U1.M24 U1.M25 U1.N1 U1.N2 U1.N3 U1.N4 U1.N5 U1.N6 U1.N7 U1.N8 U1.N9 U1.N10 U1.N11 U1.N12 U1.N13 U1.N14 U1.N15 U1.N16 U1.N17 U1.N18 U1.N19 U1.N20 U1.N21 U1.N22 U1.N23 U1.N24 U1.N25 U1.P1 U1.P2 U1.P3 U1.P4 U1.P5 U1.P6 U1.P7 U1.P8 U1.P9 U1.P10 U1.P11 U1.P12 U1.P13 U1.P14 U1.P15 U1.P16 U1.P17 U1.P18 U1.P19 U1.P20 U1.P21 U1.P22 U1.P23 U1.P24 U1.P25 U1.R1 U1.R2 U1.R3 U1.R4 U1.R5 U1.R6 U1.R7 U1.R8 U1.R9 U1.R10 U1.R11 U1.R12 U1.R13 U1.R14 U1.R15 U1.R16 U1.R17 U1.R19 U1.R20 U1.R21 U1.R22 U1.R23 U1.R24 U1.R25 U1.T1 U1.T2 U1.T3 U1.T4 U1.T5 U1.T6 U1.T7 U1.T8 U1.T9 U1.T10 U1.T11 U1.T12 U1.T13 U1.T14 U1.T15 U1.T16 U1.T17 U1.T19 U1.T20 U1.T21 U1.T22 U1.T23 U1.T24 U1.T25 U1.U1 U1.U2 U1.U3 U1.U4 U1.U5 U1.U6 U1.U7 U1.U8 U1.U9 U1.U10 U1.U11 U1.U12 U1.U13 U1.U14 U1.U15 U1.U16 U1.U17 U1.U19 U1.U20 U1.U21 U1.U22 U1.U23 U1.U24 U1.U25 U1.V1 U1.V2 U1.V3 U1.V4 U1.V5 U1.V6 U1.V7 U1.V8 U1.V19 U1.V20 U1.V21 U1.V22 U1.V23 U1.V24 U1.V25 U1.W1 U1.W2 U1.W3 U1.W4 U1.W5 U1.W6 U1.W7 U1.W8 U1.W9 U1.W10 U1.W11 U1.W12 U1.W13 U1.W15 U1.W16 U1.W17 U1.W18 U1.W19 U1.W20 U1.W21 U1.W22 U1.W23 U1.W24 U1.W25 U1.Y1 U1.Y2 U1.Y3 U1.Y4 U1.Y5 U1.Y7 U1.Y8 U1.Y9 U1.Y10 U1.Y12 U1.Y17 U1.Y18 U1.Y19 U1.Y20 U1.Y21 U1.Y22 U1.Y23 U1.Y24 U1.Y25 U2.J1 U2.J9 U2.L1 U2.L9 U2.M7

## Polygon pours and split planes (outlines as drawn)
GND on Ground Plane (split plane): 6979.9,1020.1 1020.1,1020.1 1020.1,4979.9 6979.9,4979.9
+DDR_VREF on Power Plane (split plane): 3808.48,2696.85 3808.67,2695.87 3809.22,2695.05 3839.97,2664.3 3839.97,2602.36 3840.17,2601.39 3840.72,2600.56 3871.47,2569.81 3871.47,2541.92 3843.58,2541.92 3813.57,2571.92 3813.57,2665.35 3813.38,2666.33 3812.83,2667.16 3781.33,2698.65 3780.51,2699.2 3779.53,2699.4 3761.85,2699.4 3760.87,2699.2 3760.05,2698.65 3753.2,2691.8 3752.64,2690.98 3752.45,2690 3752.45,2320 3752.64,2319.02 3753.2,2318.2 3913.2,2158.2 3914.02,2157.64 3915,2157.45 4520.63,2157.45 4521.61,2157.64 4522.43,2158.2 4522.98,2159.02 4523.18,2160 4523.18,2324.57 4531.8,2333.2 4532.35,2334.02 4532.55,2335 4532.55,2587.45 4688.32,2587.45 4688.32,2558.87 4561.32,2558.87 4560.35,2558.68 4559.52,2558.12 4558.2,2556.8 4557.65,2555.98 4557.45,2555 4557.45,2482.5 4557.45,2160 4557.65,2159.02 4558.2,2158.2 4559.02,2157.64 4560,2157.45 4770,2157.45 4770.98,2157.64 4771.8,2158.2 4811.8,2198.2 4891.06,2277.45 4907.45,2277.45 4907.45,2261.06 4778.94,2132.55 3901.06,2132.55 3727.55,2306.06 3727.55,2690 3727.55,2708.94 3744.4,2725.8 3808.48,2725.8
+1V5_DDR on Power Plane (split plane): 6979.9,1020.1 1020.1,1020.1 1020.1,4979.9 6979.9,4979.9

## Other copper
Component Side:
  region: 4601.82,2335.85
  region net DRAM_D0: 4425,2465
  region net DRAM_D7: 3968.5,2633.86
  region: 4507.33,2524.83
  region: 4507.87,2527.56
  region net DRAM_D1: 4100,2510
Solder Side:
  region net DRAM_A3: 3700,2933
  region net DRAM_A3: 3701,2932
  region net DRAM_A7: 3670.17,2901.57
  region net DRAM_A5: 4556,2373
  region: 3874.02,2570.87
  region: 4601.82,2587.82
Power Plane (plane layer: these items are gaps in the copper):
  lines w5: 3725,2305 3900,2130 4780,2130 4910,2260 4910,2280 4890,2280 4810,2200 4770,2160 4560,2160 4560,2482.5 4560,2555 4561.32,2556.32 4690.42,2556.32 4690.87,2555.87 4690.87,2590 4530,2590 4530,2335 4520.63,2325.63 4520.63,2160 3915,2160 3755,2320 3755,2690 3761.85,2696.85 3779.53,2696.85 3811.03,2665.35 3811.03,2570.86 3842.52,2539.37 3874.02,2539.37 3874.02,2570.87 3842.52,2602.36 3842.52,2665.35 3811.03,2696.85 3811.03,2728.35 3743.35,2728.35 3725,2710 3725,2690 3725,2305

## Silkscreen, mask and mechanical layers (free items; w line width, h text height)
Mechanical 1:
  region: 4916.07,2230.55